# Altium PCB PCB1.PcbDoc
Units mm, origin at the board's own origin, x right, y up, seen from the top; angles counter-clockwise.
Board outline 47.62 x 45.72 mm, 2 copper layers (Top Layer, Bottom Layer); 12 components, 11 nets, 43 pads, 0 vias.
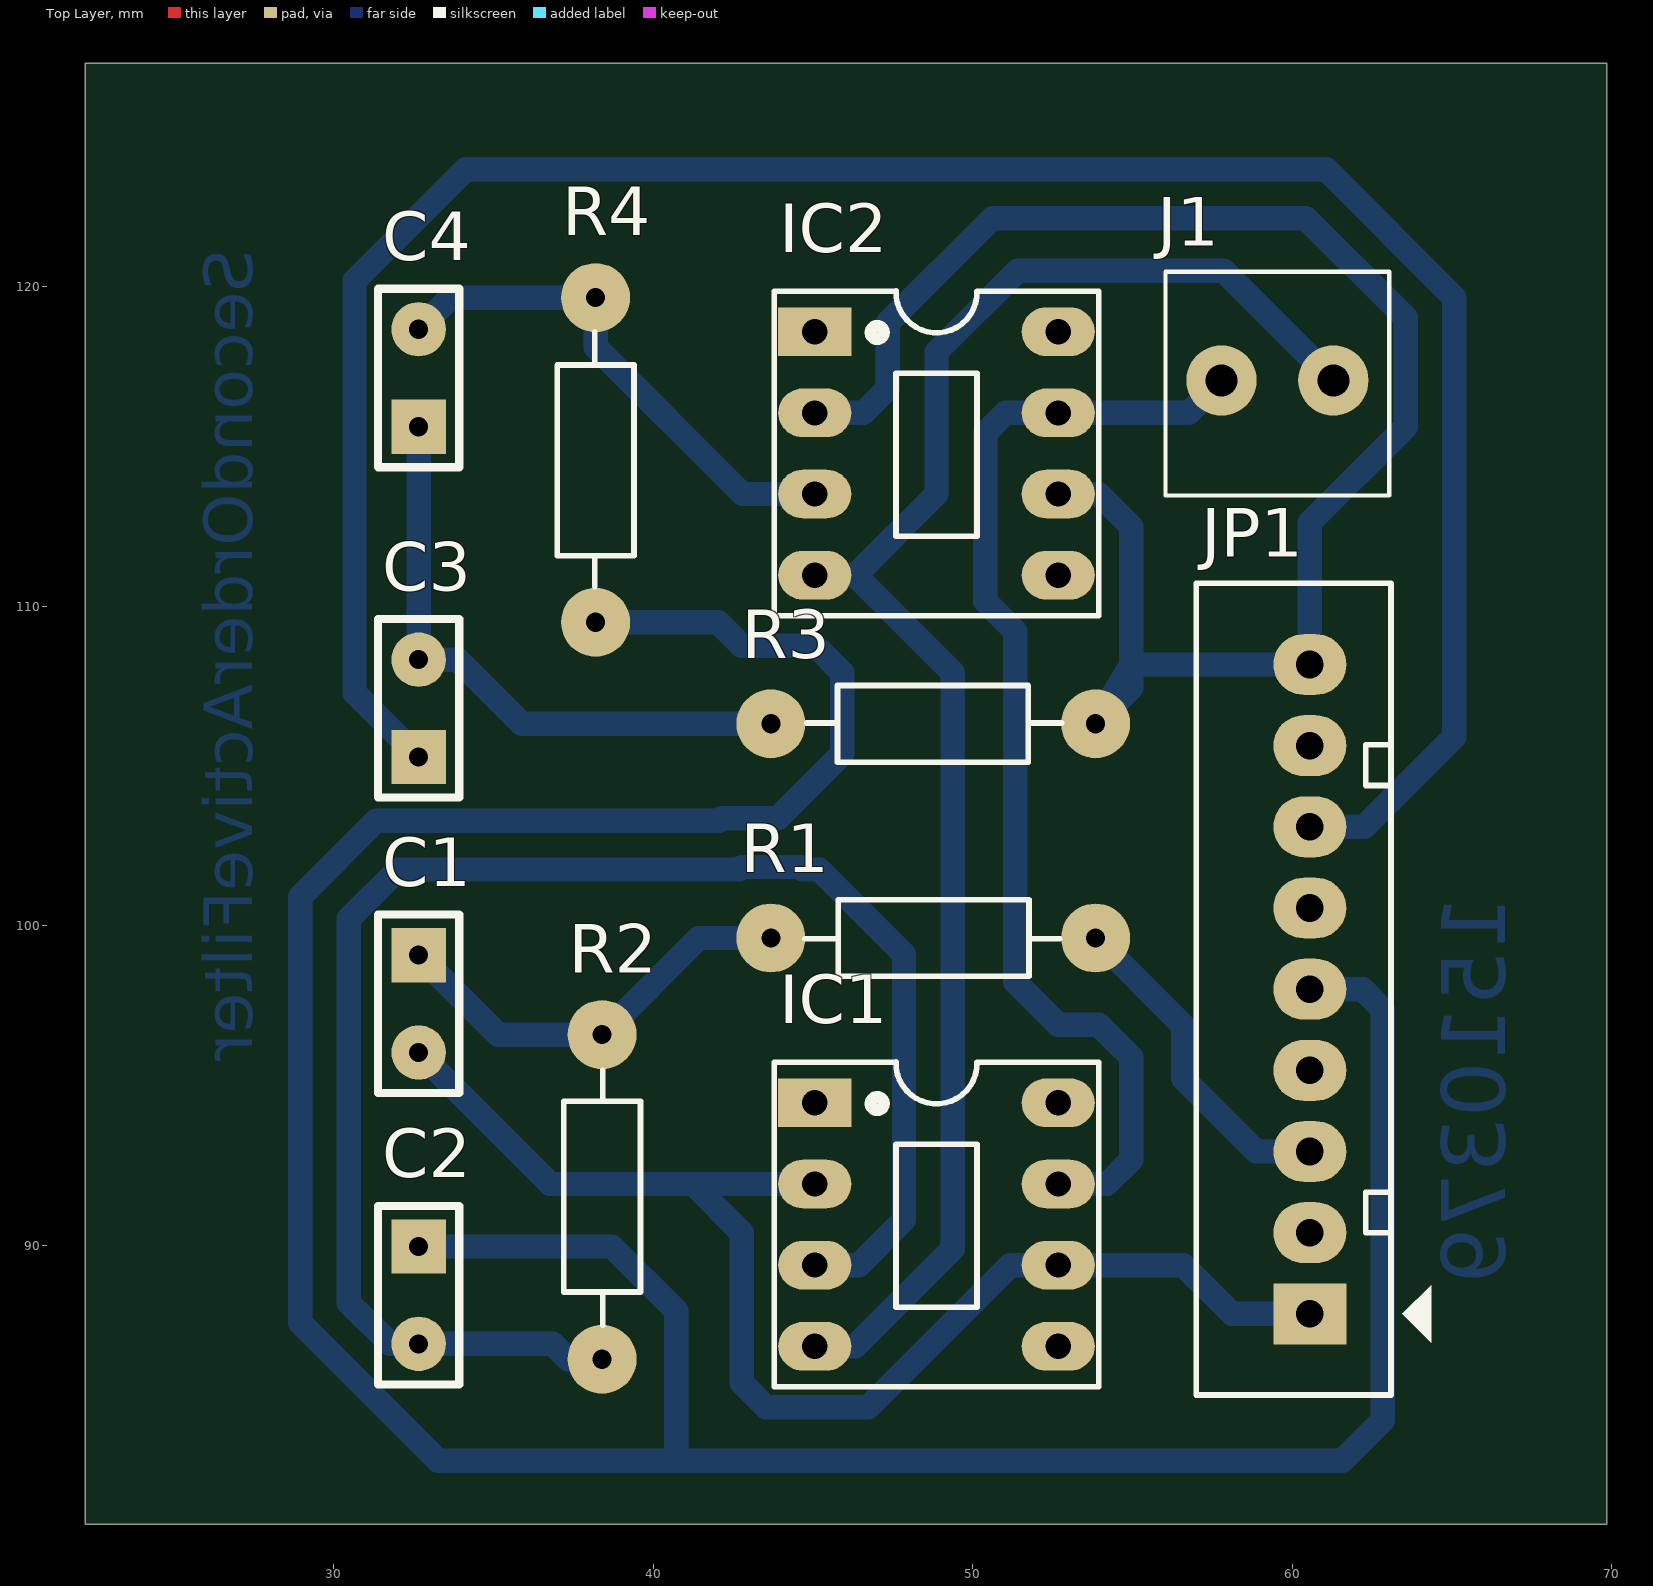
[diagram p0: Top Layer view]
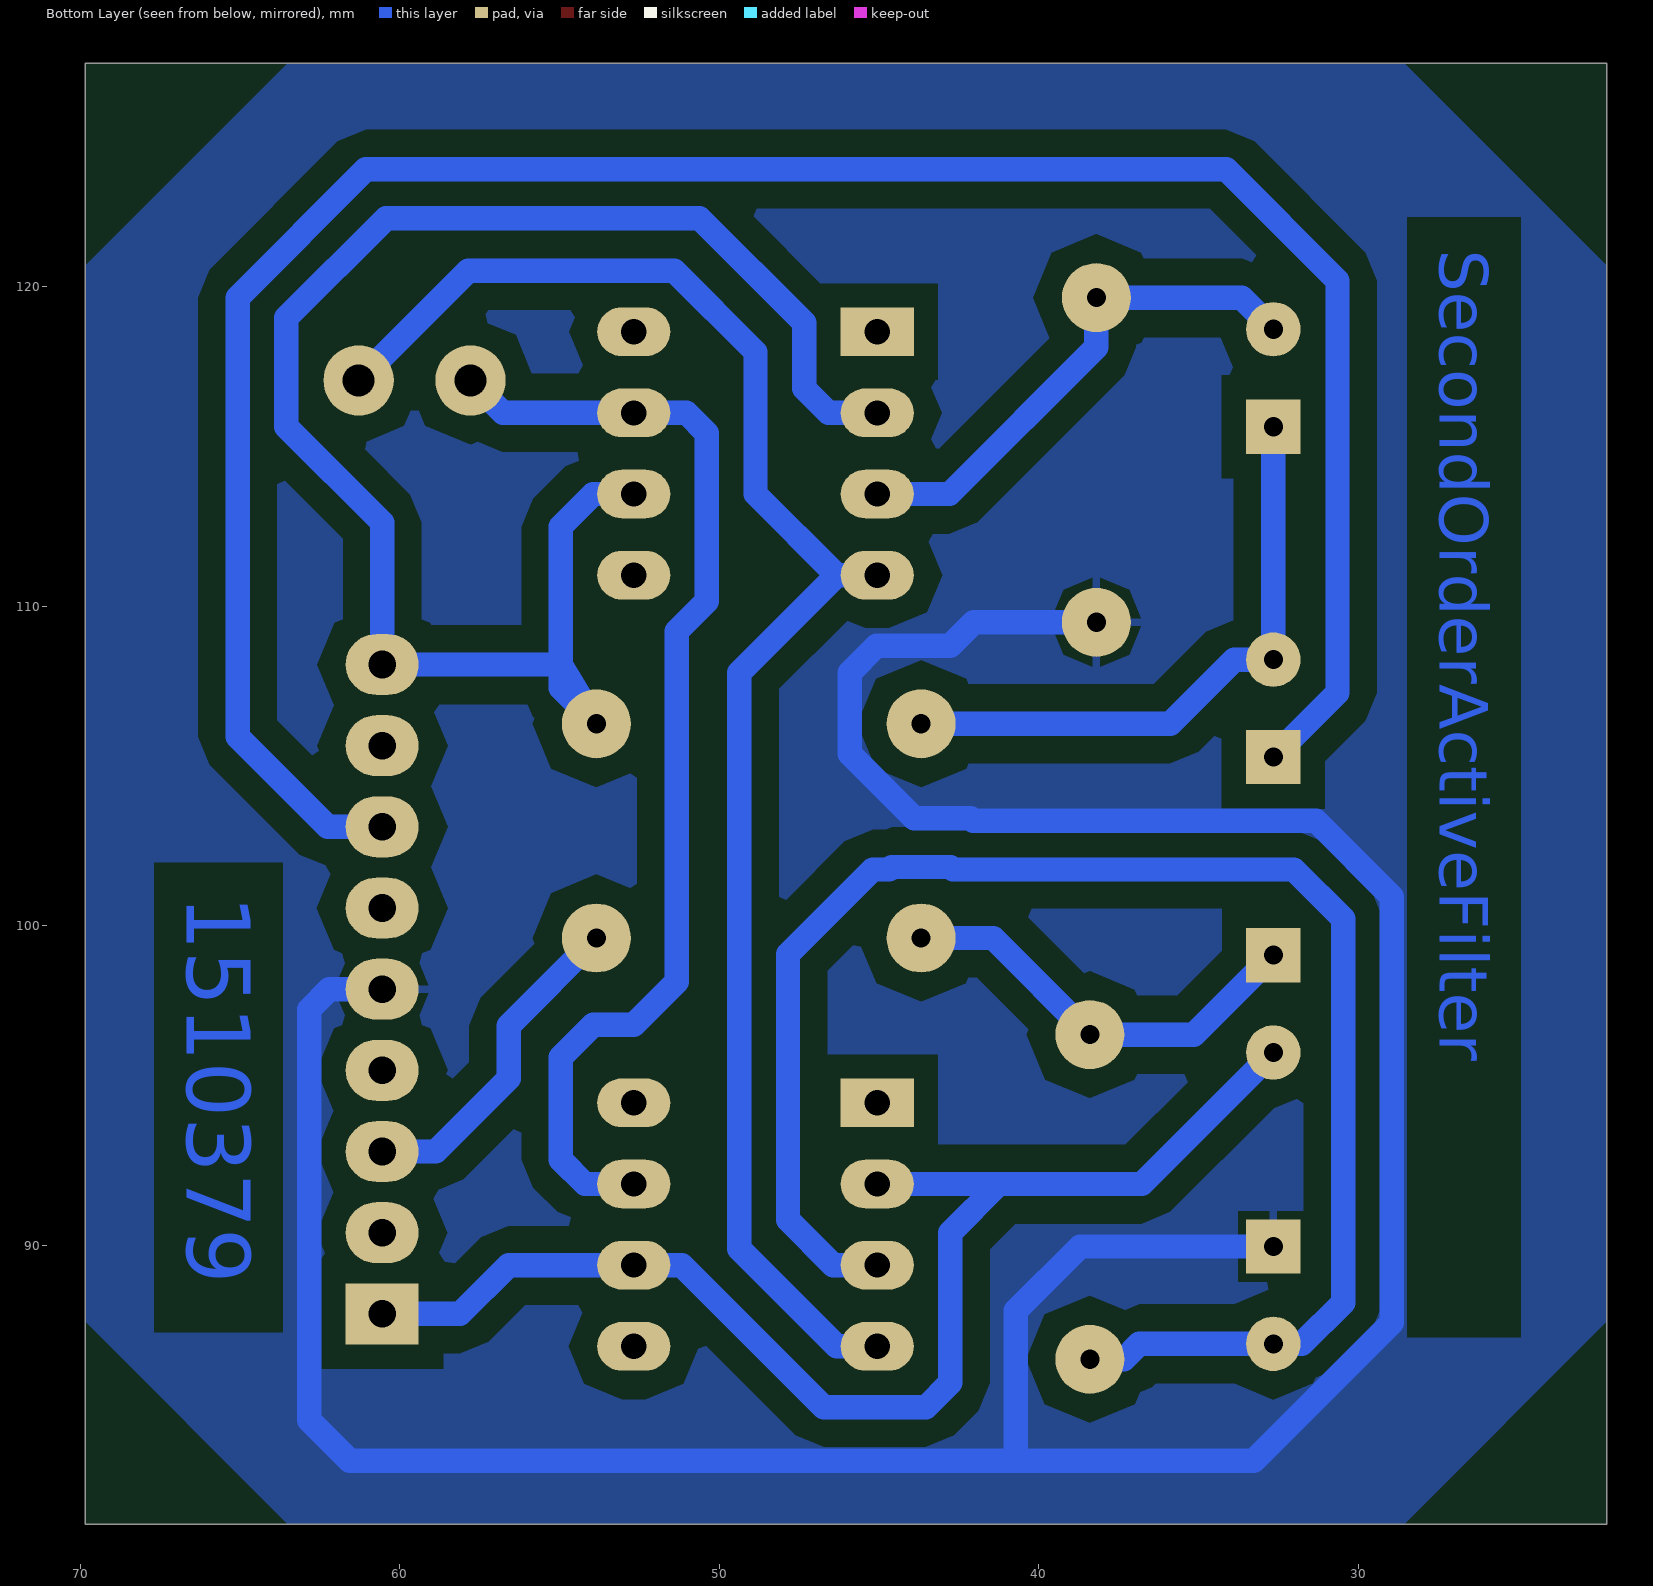
[diagram p1: Bottom Layer view, seen from below]
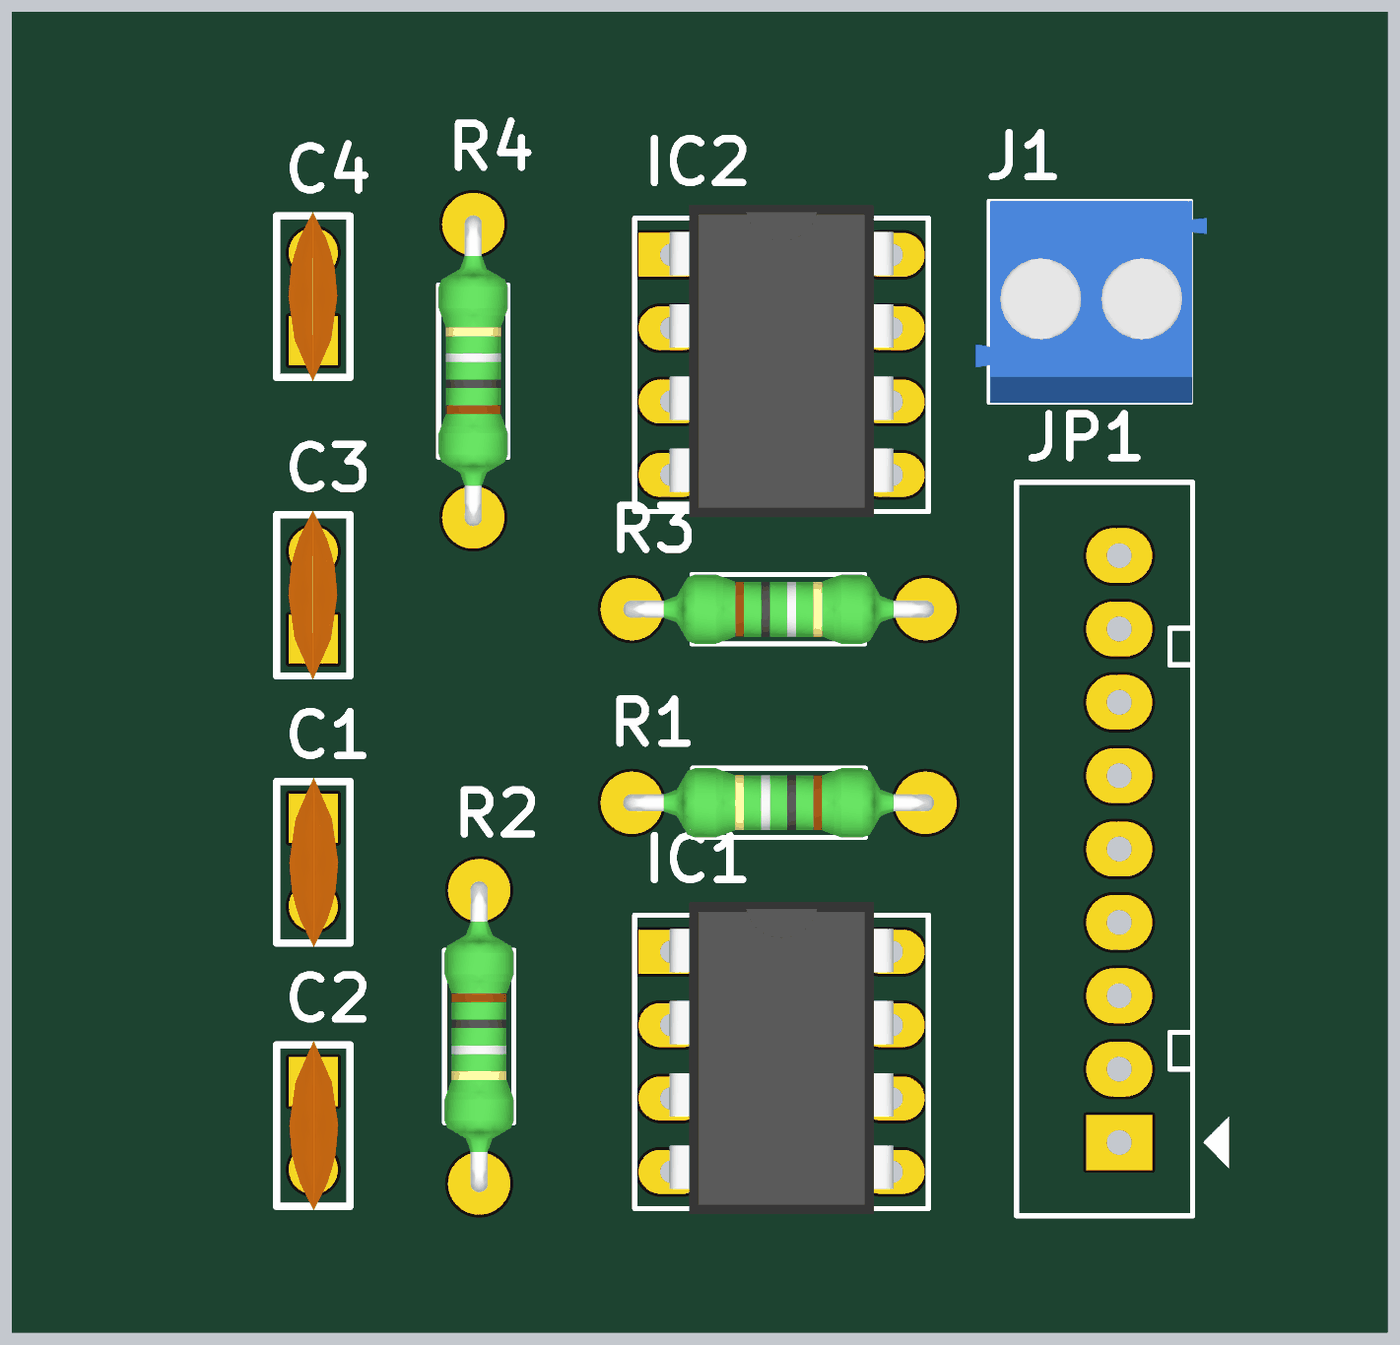
[diagram p2: 3D render of the assembled board from above, using the file's embedded part models]

## Layer stack, top to bottom
Top Solder: solder mask 0.0102, Solder Resist, Dk 3.5
Top Layer: signal copper 0.0356
Dielectric 1: dielectric 0.32, FR-4, Dk 4.8
Bottom Layer: signal copper 0.0356
Bottom Solder: solder mask 0.0102, Solder Resist, Dk 3.5

## Board outline
22.225,81.28 22.225,127 69.85,127 69.85,81.28

## Design rules (kind name [scope] priority, off if disabled: settings)
Clearance [All] p1: gap=0.762
PolygonConnect [All] p1: connectstyle=Relief reliefconductorwidth=0.254 reliefentries=4 polygonreliefangle="90 Angle" airgapwidth=0.254
RoutingLayers [All] p1: top layer_v5=FALSE bottom layer_v5=TRUE
RoutingVias [All] p1: holewidth=0.711 width=2.032 viastyle="Through Hole" minholewidth=0.711 minwidth=2.032 maxholewidth=0.711 maxwidth=2.032
SolderMaskExpansion [All] p1: expansion=0.102
Width [All] p1: maxlimit=1.016 minlimit=0.508 preferedwidth=0.762
29 further rules are at their usual default settings.

## Components (designator, comment, footprint, x,y, rotation, side; value= is the part's Value field where it differs from the comment)
C1 "Cap Non-pol" "Cap Non-Pol 3mm" 32.664,97.561 r270 top
C2 "Cap Non-pol" "Cap Non-Pol 3mm" 32.664,88.443 r270 top
C3 "Cap Non-pol" "Cap Non-Pol 3mm" 32.664,106.807 r90 top
C4 "Cap Non-pol" "Cap Non-Pol 3mm" 32.664,117.145 r90 top
IC1 "LM741" DIP8 48.87,90.78 r270 top
IC2 "LM741" DIP8 48.87,114.91 r270 top
J1 "KF2" KF2-3.5 59.538,117.069 r0 top
JP1 "JP9" Header9 60.554,87.859 r90 top
R1 "22K" RES-1/4W 49.149,99.492 r0 top
R2 "22K" RES-1/4W 38.532,91.897 r90 top
R3 "100K" RES-1/4W 48.387,106.451 r180 top
R4 "100K" RES-1/4W 38.075,114.198 r270 top

## Footprints (in the part's own frame and the unit in brackets; to place one, negate y for a bottom-side part, rotate by r counter-clockwise, add the part's x,y. Pads: shape width x height; smd on the part's side, far side on the other; paste and mask are expansions set on the pad)
"Cap Non-Pol 3mm" [mil] "Capacitor, Radial; Body 5.6 x 2.5 mm (L x W typ); Pin Spacing 3 mm (typ); Solder Pad 35mil"
  rect 67x67 hole 23.62: 1(-60,0)
  round 67 hole 23.62: 2(60,0)
  silkscreen extent -110,-50 110,50, body extent -115,-33 115,34, height 245
DIP8 [mil] "DIP, 8-Leads, Row Spacing 7.62mm, Pitch 2.54mm, Body 9.91x6.73mm"
  rect 60x90 hole 31: 1(-145,-150)
  oval 60x90 hole 31: 2(-45,-150) 3(55,-150) 4(155,-150) 5(155,150) 6(55,150) 7(-45,150) 8(-145,150)
  silkscreen extent -195,-200 205,200, body extent -213,-153 213,153, height 177
Header9 [mil] "CON9"
  rect 75x90 hole 34: 1(0,0)
  oval 75x90 hole 34: 2(100,0) 3(200,0) 4(300,0) 5(400,0) 6(500,0) 7(600,0) 8(700,0) 9(800,0)
  silkscreen extent -100,-150 900,140
KF2-3.5 [mm] "3,50mm - modular - blue - Horizontal wire entry - Pressure clamp - 8,4mm height - 02p"
  round 2.2 hole 1: 1(-1.75,0) 2(1.75,0)
  silkscreen extent -3.5,-3.6 3.5,3.4, body extent -3.95,-3.6 4.05,3.4, height 8.41
RES-1/4W [mil]
  round 85 hole 23.62: 1(-215,5) 2(185,5)
  silkscreen extent -173,-42 141,52, body extent -227,-42 197,52, height 95

## Part data
C1 C2 C3 C4: "Non-polarized Capacitor"
IC1 IC2: "Single OA"
JP1: library part Header9, "Connector 9"
R1 R2 R3 R4: library part Res, "Res"

## Nets (pads, with @x,y where several pads share a name; then routed paths per layer and width w, separated by ;. In a path a pad name is that pad's centre, name@x,y a point inside that pad or via, vN(x,y) a via of type N, cw(c..) or ccw(c..) an arc to the next point about the centre after c; other vN are vias at no path point)
GND: C2.1 JP1.5 R4.2 | length 108.3
  Bottom Layer w0.762: C2.1 38.71,89.967 40.722,87.955 40.722,83.261 ; R4.2 42.037,109.499 42.774,108.763 45.085,108.763 45.923,107.925 45.923,105.385 43.904,103.365 42.136,103.365 42.06,103.289 31.331,103.289 28.956,100.914 28.956,87.579 33.274,83.261 40.722,83.261 ; JP1.5 62.205,98.019 62.84,97.384 62.84,84.531 61.57,83.261 40.722,83.261
GND01: IC1.4 IC2.4 J1.2 | length 52.1
  Bottom Layer w0.762: IC1.4 46.33,86.843 49.378,89.891 49.378,107.925 46.33,110.973 ; IC2.4 46.33,110.973 ; J1.2 57.859,120.498 51.41,120.498 48.87,117.958 48.87,113.513 46.33,110.973
NetC1_1: C1.1 R1.1 R2.2 | length 13.3
  Bottom Layer w0.762: C1.1 35.154,96.596 R2.2 41.427,99.619 R1.1
NetC1_2: C1.2 IC1.2 IC1.6 JP1.1 | length 41.5
  Bottom Layer w0.762: C1.2 36.779,91.923 41.25,91.923 ; IC1.2 41.25,91.923 ; JP1.1 58.115,87.859 56.591,89.383 IC1.6 51.181,89.383 46.736,84.938 43.536,84.938 42.774,85.7 42.774,90.399 41.25,91.923
NetC2_2: C2.2 IC1.3 R2.1 | length 51.5
  Bottom Layer w0.762: R2.1 37.338,86.436 36.855,86.919 C2.2 31.772,86.919 30.48,88.21 30.48,100.219 32.026,101.765 42.691,101.765 42.767,101.841 44.609,101.841 44.685,101.765 45.199,101.765 47.854,99.111 47.854,90.805 46.431,89.383 IC1.3
NetC3_1: C3.1 JP1.7 | length 72.7
  Bottom Layer w0.762: C3.1 30.658,107.29 30.658,120.193 34.138,123.673 61.062,123.673 65.075,119.659 65.075,105.918 62.255,103.099 JP1.7
NetC3_2: C3.2 C4.1 R3.2 | length 19.1
  Bottom Layer w0.762: C4.1 C3.2 33.884,108.331 35.89,106.324 R3.2
NetC4_2: C4.2 IC2.3 R4.1 | length 16.3
  Bottom Layer w0.762: C4.2 33.655,119.659 R4.1 38.202,118.11 42.799,113.513 IC2.3
NetIC2_2: IC2.2 IC2.6 JP1.9 R3.1 | length 52.7
  Bottom Layer w0.762: IC2.2 46.584,116.053 47.346,116.815 47.346,118.872 50.622,122.149 60.43,122.149 63.551,119.028 63.551,115.621 60.554,112.624 JP1.9 54.966,108.179 ; IC2.6 53.95,113.513 54.966,112.497 54.966,108.179 ; 54.966,108.179 54.966,107.442 R3.1 54.966,108.179
NetJP1_3: JP1.3 R1.2 | length 10.4
  Bottom Layer w0.762: R1.2 56.591,96.876 56.591,95.225 58.877,92.939 JP1.3
VCC: IC1.7 IC2.7 J1.1 | length 36.1
  Bottom Layer w0.762: IC1.7 54.204,91.923 54.966,92.685 54.966,95.885 53.95,96.901 52.68,96.901 51.333,98.247 51.333,109.22 50.394,110.16 50.394,115.418 51.029,116.053 IC2.7 56.772,116.053 J1.1
pads on no net: IC1.1 IC1.5 IC1.8 IC2.1 IC2.5 IC2.8 JP1.2 JP1.4 JP1.6 JP1.8

## Polygon pours and split planes (outlines as drawn)
GND on Bottom Layer "Mechanical 1-No Net" (solid, pour order 15): 22.225,120.65 28.575,127 63.5,127 69.85,120.65 69.85,87.63 63.5,81.28 28.575,81.28 22.225,87.63 22.225,120.65

## Other copper
Bottom Layer:
  text "SecondOrderActiveFilter" at 27.457,121.158 h1.52 r90
  text "1510379" at 66.675,100.965 h2 r90